# EAGLE board QSlider (EAGLE 5.06)
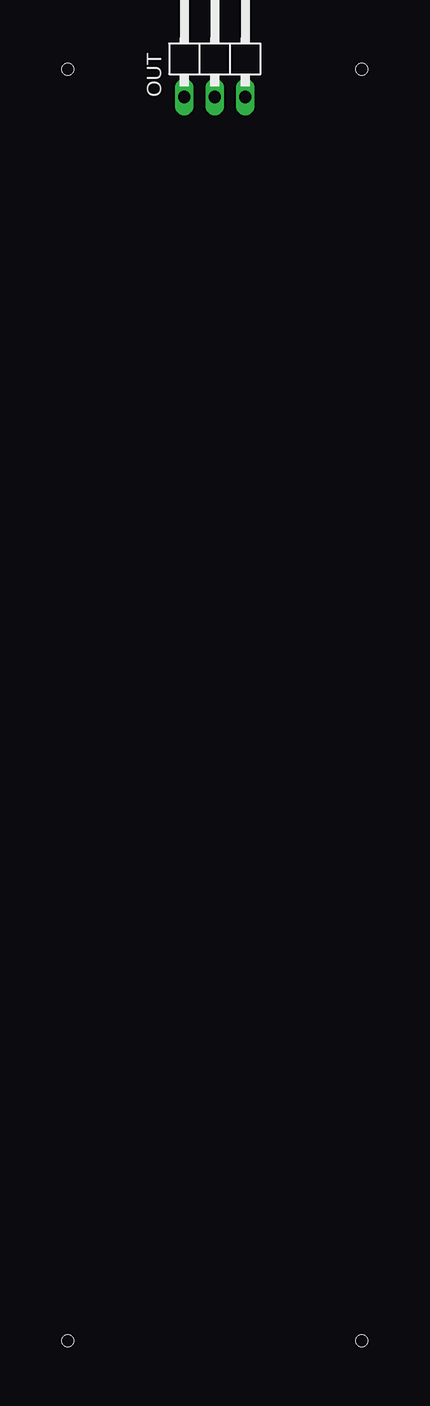
[diagram p0: board, top side]
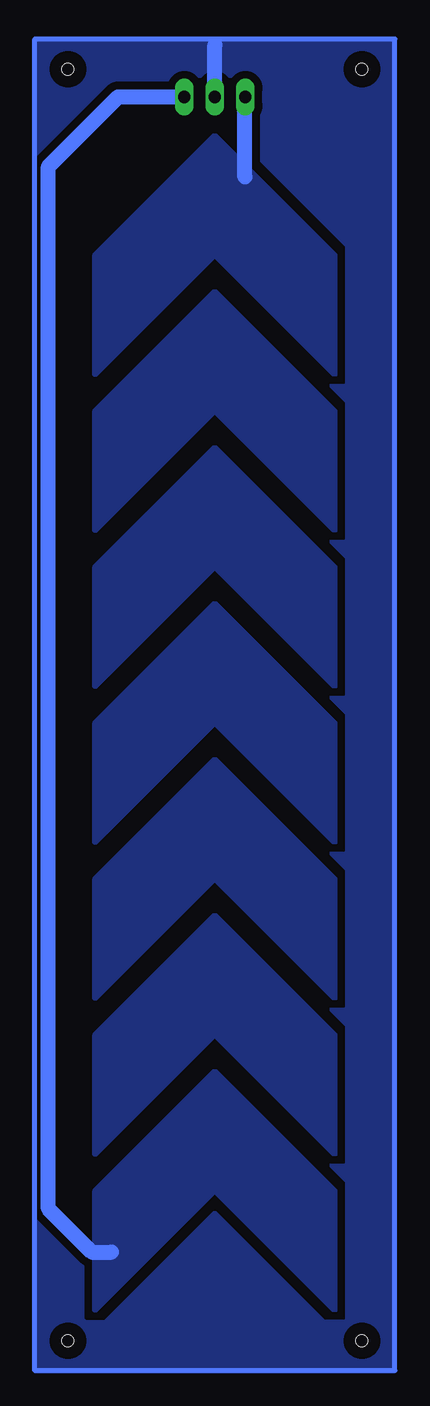
[diagram p1: board, bottom side, seen from below]

No outline drawn. Coordinates in mm, seen from the top.
Copper layers (1*16): Top 0.035mm / dielectric 1.5mm / Bottom 0.035mm
Design rules "default": minimum track width 10mil, minimum drill 24mil, track to track 8mil, track to pad 8mil, pad to pad 8mil, via to via 8mil, smd to smd 8mil, copper to edge 40mil, drill to drill 8mil, minimum pad ring 10mil, minimum via ring 8mil, stop-mask expansion 4mil, vias tented up to drill 0mil, thermal gap 10mil
Holes 1 mm at 2.75,108.5 27.25,108.5 2.75,2.5 27.25,2.5

## Footprints (pad centres in the part's own frame; a part is rotated, then mirrored left to right if it is on the bottom)
1X03/90 = drill 1.016 long: 1 -2.54,-3.81; 2 0,-3.81; 3 2.54,-3.81

## Placement (x,y rotation side)
OUT  [1X03/90]  15,110 0 top

## Library data of the parts
OUT = pinhead

## Tracks (layer width: path | path; a pad name or v marks a point on that pad's centre or on a via)
GND
  Bottom 0.406: 0,111 30,111 30,0 0,0 0,111
  Bottom 1.27: 15,106.25 15,110.5
  pour Bottom (isolate 0.65, rank 6): 0,111 30,111 30,0 0,0
X
  Bottom 1.27: 12.5,99.5 12.5,106.25
  pour Bottom: 25,83 25,93 15,103 5,93 5,83 15,93
X1
  pour Bottom: 25,70 25,80 15,90 5,80 5,70 15,80
X2
  pour Bottom: 25,57 25,67 15,77 5,67 5,57 15,67
X3
  pour Bottom: 25,44 25,54 15,64 5,54 5,44 15,54
X4
  pour Bottom: 25,31 25,41 15,51 5,41 5,31 15,41
X5
  pour Bottom: 25,18 25,28 15,38 5,28 5,18 15,28
Y
  Bottom 1.27: 23.62,9.88 25.25,9.88 28.88,13.5 28.88,100.38 23.06,106.19 17.56,106.19
  pour Bottom: 25,5 25,15 15,25 5,15 5,5 15,15